# Altium PCB WorkLamp_control.PcbDoc
Units mm, origin at the board's own origin, x right, y up, seen from the top; angles counter-clockwise.
Board outline 40.89 x 73.15 mm, 2 copper layers (Top Layer, Bottom Layer), stack 1.571 mm thick; 63 components, 70 nets, 213 pads, 63 vias.
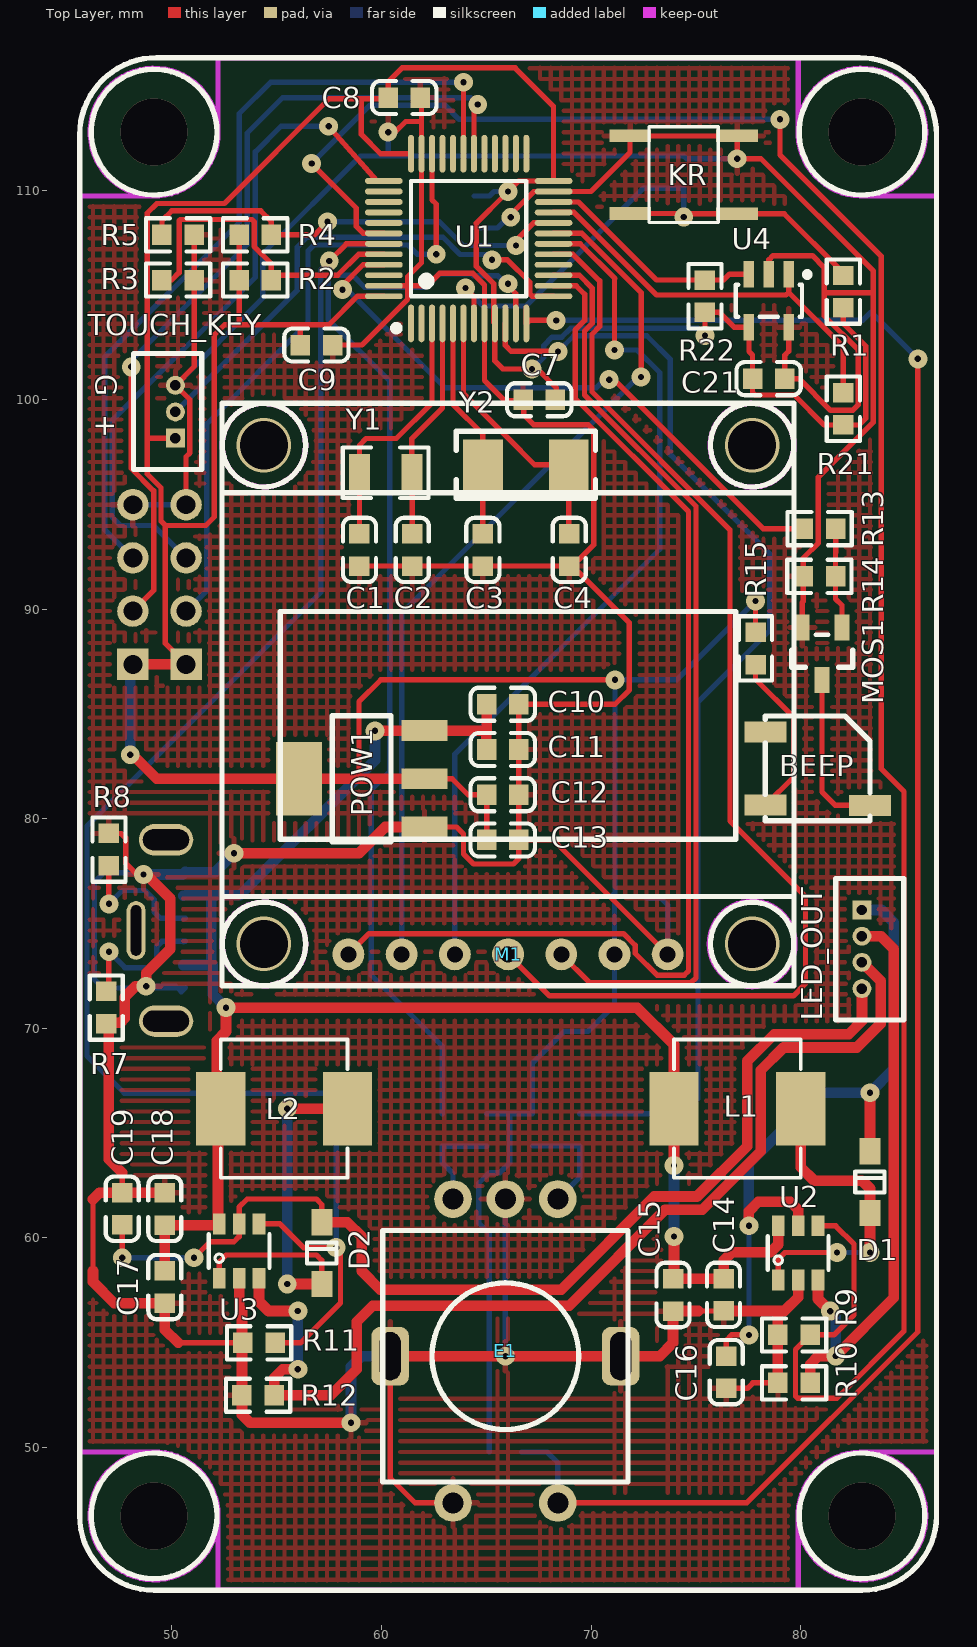
[diagram p0: Top Layer view]
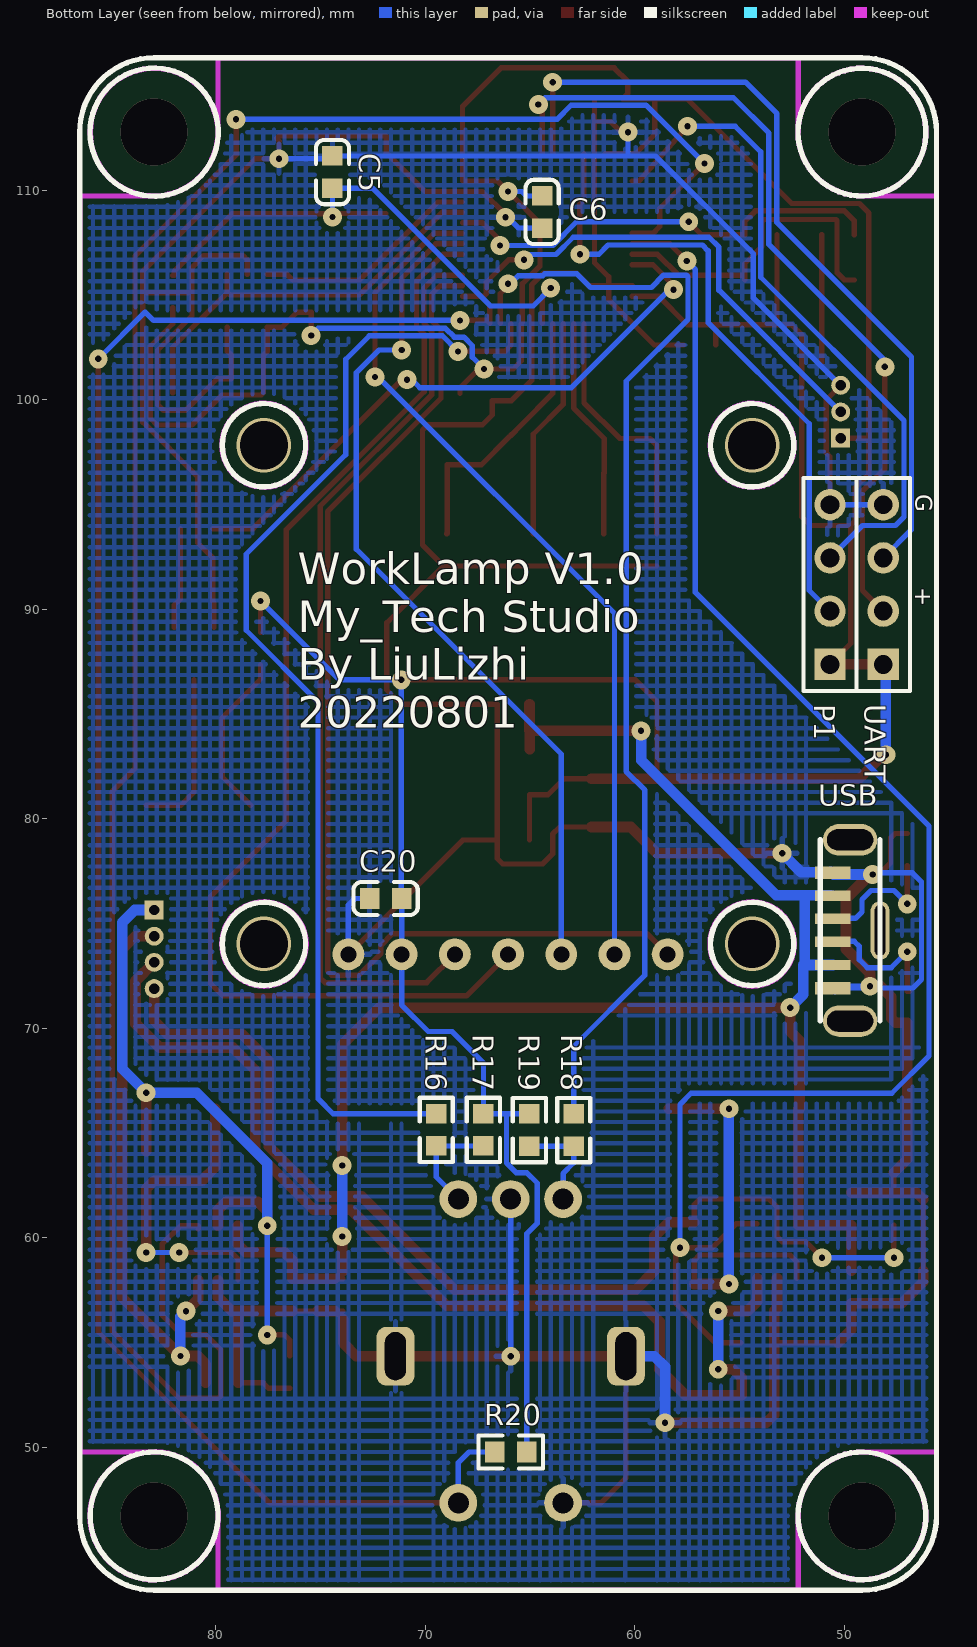
[diagram p1: Bottom Layer view, seen from below]
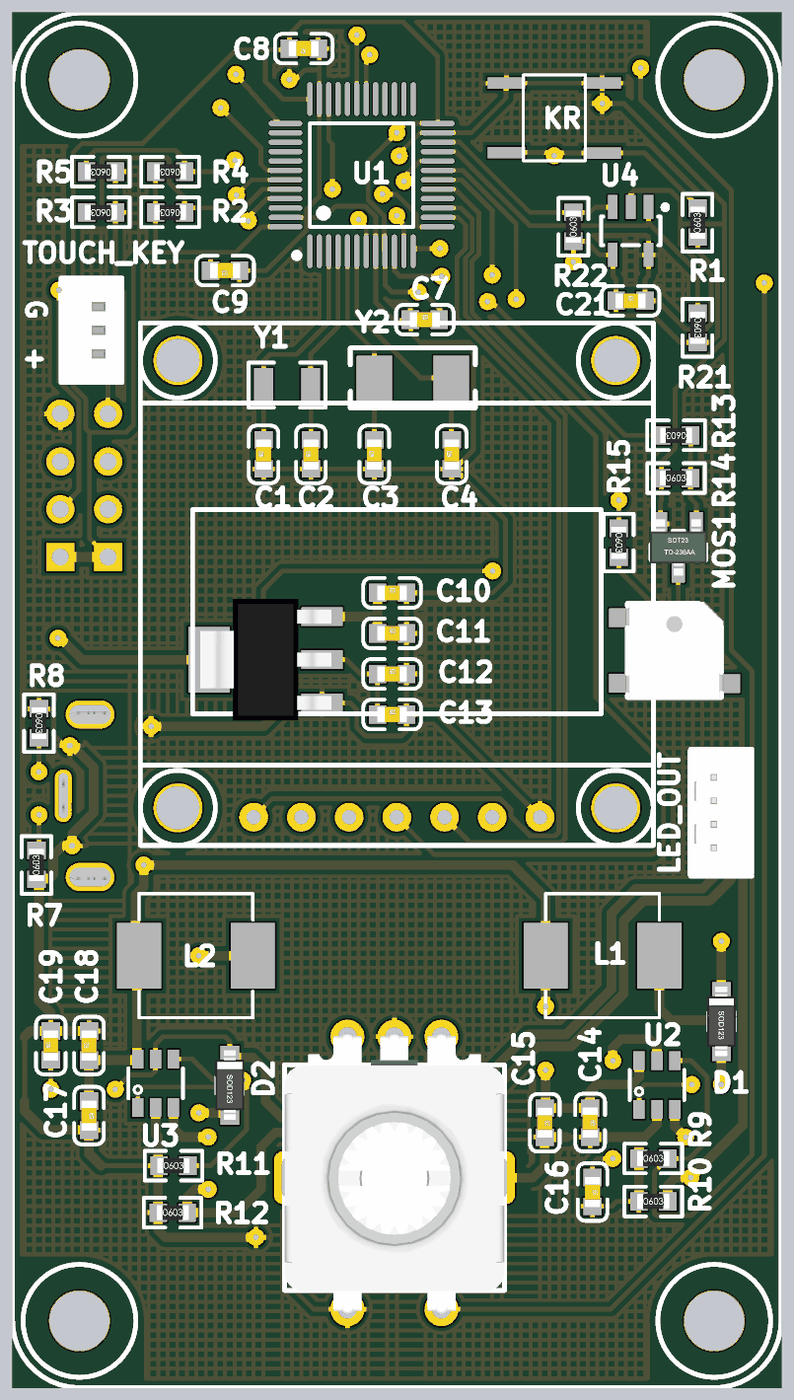
[diagram p2: 3D render of the assembled board from above, using the file's embedded part models]
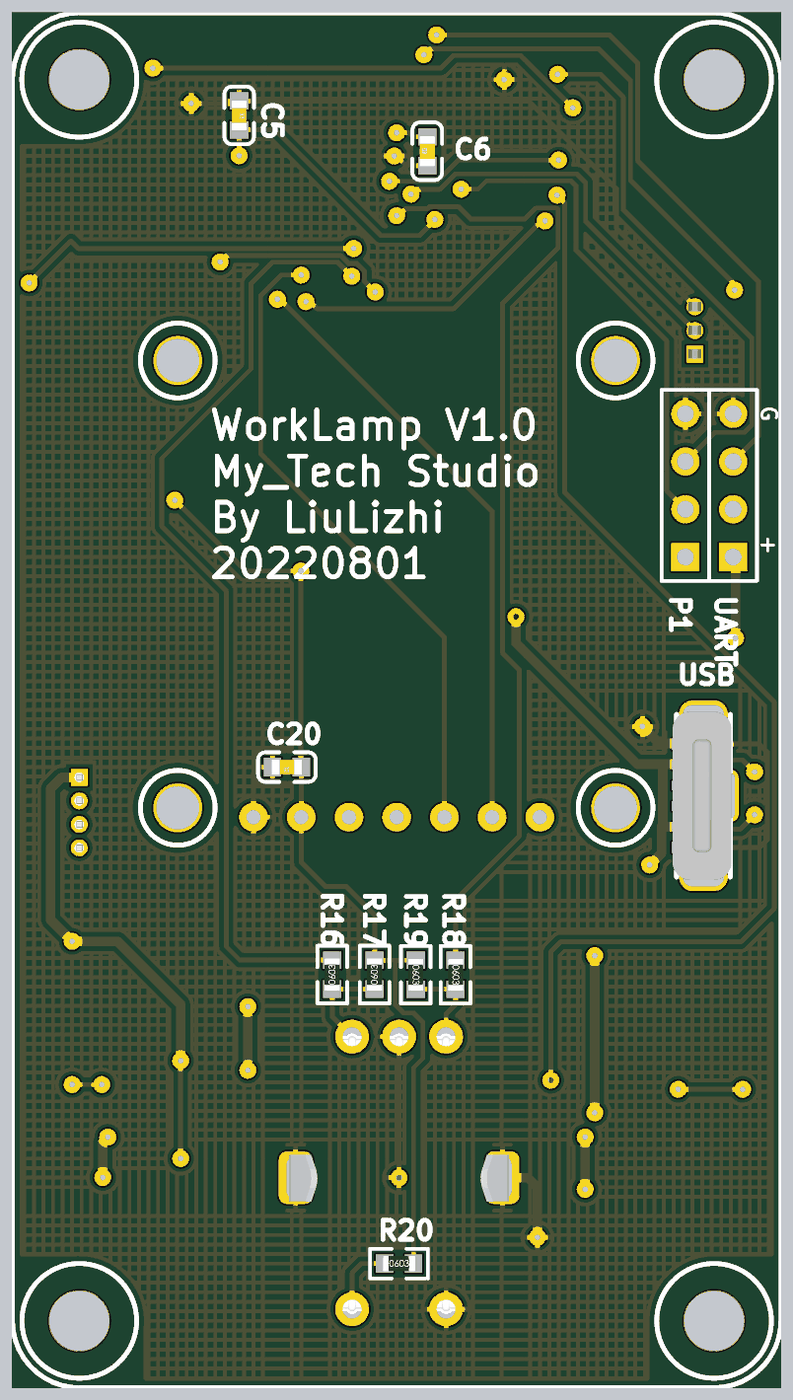
[diagram p3: 3D render of the assembled board from below, using the file's embedded part models]

## Layer stack, top to bottom
Top Solder: solder mask 0.0102, Solder Resist, Dk 3.5
Top Layer: signal copper 0.0356
Dielectric 1: dielectric 1.5, FR-4, Dk 4.8
Bottom Layer: signal copper 0.0356
Bottom Solder: solder mask 0.0102, Solder Resist, Dk 3.5

## Board outline
45.593,46.736 ccw(c49.149,46.736) 49.149,43.18 82.931,43.18 ccw(c82.931,46.736) 86.487,46.736 86.487,112.649 ccw(c82.804,112.649) 82.804,116.332 49.276,116.332 ccw(c49.276,112.649) 45.593,112.649

## Design rules (kind name [scope] priority, off if disabled: settings)
Clearance Clearance_4 [InNamedPolygon('GND_L01_P012')] p1: gap=0.254 ignorepadtopadclearanceinfootprint=FALSE except(0: Arc-Hole Track-Hole SMDPad-Hole THPad-Hole Via-Hole Fill-Hole Poly-Hole Region-Hole Text-Hole)
Clearance Clearance_3 [InNamedPolygon('GND_L01_P012')] p2: gap=0.254 ignorepadtopadclearanceinfootprint=FALSE
Clearance Clearance_2 [InNamedPolygon('NONET_L01_P010')] p3: gap=0.254 ignorepadtopadclearanceinfootprint=FALSE except(0: Arc-Hole Track-Hole SMDPad-Hole THPad-Hole Via-Hole Fill-Hole Poly-Hole Region-Hole Text-Hole)
Clearance Clearance_1 [InNamedPolygon('GND_L02_P008')] p4: gap=0.254 ignorepadtopadclearanceinfootprint=FALSE
Clearance [All] p5: gap=0.102 ignorepadtopadclearanceinfootprint=FALSE
ComponentClearance [All] p1 off: gap=0.254 collisioncheckmode=3 verticalgap=0.254 showdistances=FALSE
DiffPairsRouting [All] p1: maxlimit=0.254 minlimit=0.152 mostfreqgap=0.152 toplayer_minwidth=0.381 toplayer_maxwidth=0.381 toplayer_prefwidth=0.381 bottomlayer_minwidth=0.381 bottomlayer_maxwidth=0.381 bottomlayer_prefwidth=0.381 maxuncoupledlength=12.7
MinimumSolderMaskSliver [All] p1: minsoldermaskwidth=0.102
PolygonConnect [All] p1: connectstyle=Relief reliefconductorwidth=0.254 reliefentries=4 polygonreliefangle="90 Angle" airgapwidth=0.254
RoutingVias [All] p1: holewidth=0.3 width=0.9 viastyle="Through Hole" minholewidth=0.3 minwidth=0.9 maxholewidth=0.711 maxwidth=1.27
SilkToSilkClearance [All] p1 off: silktosilkclearance=0.254
SilkToSolderMaskClearance [IsPad] p1 off: minsilkscreentomaskgap=0.254 clearancetoexposedcopper=TRUE
SolderMaskExpansion [All] p1: expansion=0.102
Width [All] p1: maxlimit=0.508 minlimit=0.102 preferedwidth=0.254 minimp=50.000000 maximp=50.000000 favimp=50.000000
25 further rules are at their usual default settings.

## Classes and differential pairs
polygon class PolygonClass_2: GND_L02_P008

## Components (designator, comment, footprint, x,y, rotation, side; value= is the part's Value field where it differs from the comment)
BEEP "BEEP_5020_SMT" BEEP_5020_SMT 78.312,79.907 r0 top
C1 "10PF" 0603_C 58.948,92.837 r90 top
C2 "10PF" 0603_C 61.468,92.837 r90 top
C3 "10PF" 0603_C 64.839,92.837 r90 top
C4 "10PF" 0603_C 68.961,92.837 r90 top
C5 "104" 0603_C 74.422,110.871 r270 bottom
C6 "104" 0603_C 64.412,108.966 r90 bottom
C7 "104" 0603_C 67.527,100.005 r0 top
C8 "104" 0603_C 61.087,114.427 r180 top
C9 "104" 0603_C 56.896,102.616 r180 top
C10 "4.7uF" 0603_C 65.786,85.471 r0 top
C11 "104" 0603_C 65.786,83.312 r0 top
C12 "4.7uF" 0603_C 65.786,81.153 r0 top
C13 "104" 0603_C 65.786,78.994 r0 top
C14 "104" 0603_C 76.327,57.285 r270 top
C15 "22uF" 0603_C 73.914,57.277 r270 top
C16 "104" 0603_C 76.454,53.594 r270 top
C17 "104" 0603_C 49.657,57.658 r270 top
C18 "22uF" 0603_C 49.657,61.383 r90 top
C19 "104" 0603_C 47.625,61.391 r90 top
C20 "104" 0603_C 71.882,76.2 r0 bottom
C21 "104" 0603_C 78.478,101.009 r0 top
D1 "MBR0520" SOD_123 83.312,62.865 r90 top
D2 "MBR0520" SOD_123 57.15,59.478 r90 top
E1 "ENCODER" ENCODER_EC11_DIP 65.913,54.356 r180 top
KR "KEY_SMT" KEY_SMT 74.422,110.744 r0 top
L1 "10uH" 0630_L 80.01,66.167 r180 top
L2 "10uH" 0630_L 58.374,66.167 r180 top
LED_OUT "SH1.25mm_4P" SH1.25MM_4P 82.931,71.902 r90 top
M1 "OLED" OLED_0.96_SPI 66.04,73.533 r180 top
MOS1 "SI2302" SOT23 81.026,87.884 r270 top
P1 "SWD" HDR1X4 50.673,87.376 r90 bottom
POW1 "AMS1117_3.3" SOT223 59.055,81.915 r0 top
R1 "10K" 0603_R 82.042,105.164 r90 top
R2 "10K" 0603_R 53.975,105.716 r180 top
R3 "10K" 0603_R 50.292,105.716 r180 top
R4 "10K" 0603_R 53.975,107.875 r180 top
R5 "10K" 0603_R 50.292,107.875 r180 top
R7 "5.1K" 0603_R 46.863,70.993 r90 top
R8 "5.1K" 0603_R 46.99,78.535 r270 top
R9 "10K" 0603_R 79.69,55.372 r0 top
R10 "1.5R" 0603_R 79.69,53.086 r0 top
R11 "10K" 0603_R 54.155,54.991 r0 top
R12 "1.5R" 0603_R 54.11,52.493 r0 top
R13 "100R" 0603_R 80.907,93.853 r180 top
R14 "10K" 0603_R 80.899,91.575 r0 top
R15 "10R" 0603_R 77.851,88.138 r270 top
R16 "10K" 0603_R 69.469,65.159 r90 bottom
R17 "10K" 0603_R 67.218,65.159 r90 bottom
R18 "10K" 0603_R 62.905,65.151 r270 bottom
R19 "10K" 0603_R 65.024,65.151 r270 bottom
R20 "10K" 0603_R 65.913,49.784 r180 bottom
R21 "10K" 0603_R 82.042,99.572 r270 top
R22 "10K" 0603_R 75.438,104.946 r90 top
TOUCH_KEY "SH1.25mm_3P" SH1.25mm_3P 50.165,100.691 r270 top
U1 "STM32F103C8T6" LQFP48 64.262,107.696 r90 top
U2 "SGM3732" TSOT_23_6 78.933,57.989 r90 top
U3 "SGM3732" TSOT_23_6 52.255,58.081 r90 top
U4 "CAT24C02_TSOT23" SOT_23_5 80.325,105.998 r270 top
UART "Header_2.54_4P" HDR1_4P 48.133,87.376 r90 bottom
USB "USB_C_6P_SMT_S1" USB_C_6PIN_SMT_S1 50.546,74.676 r90 bottom
Y1 "32.768K" XTAL_32.768_3215_2 60.198,96.52 r180 top
Y2 "8Mhz" XTAL_5032_2 66.889,96.901 r180 top

## Footprints (in the part's own frame and the unit in brackets; to place one, negate y for a bottom-side part, rotate by r counter-clockwise, add the part's x,y. Pads: shape width x height; smd on the part's side, far side on the other; paste and mask are expansions set on the pad)
0603_C [mm]
  rect 0.93x0.98 smd: 1(-0.77,0) 2(0.77,0)
  silkscreen extent -1.53,-0.79 1.54,0.79, body extent -0.8,-0.4 0.8,0.4, height 0.3
0603_R [mm]
  rect 0.93x0.98 smd: 1(-0.77,0) 2(0.77,0)
  silkscreen extent -1.53,-0.79 1.54,0.79, body extent -0.85,-0.4 0.85,0.4, height 0.56
0630_L [mm]
  rect 2.35x3.5 smd: 1(0,0) 2(6.05,0)
  silkscreen extent 0,-3.3 6.05,3.3
BEEP_5020_SMT [mm]
  rect 2x1 smd: 0(0.02,4.238) 1(0.012,0.75) 2(5,0.738)
  silkscreen extent 0,0 5,5, body extent -0.1,-0.11 5.1,5.09, height 2
ENCODER_EC11_DIP [mm]
  round 1.8 hole 1: 1(-2.5,-7.5) 2(0,-7.5) 3(2.5,-7.5) 4(-2.5,7) 5(2.5,7)
  rrect50% 1.8x2.8 hole 2.3 slot 1 at 0 deg: 6(-5.5,0) 6(5.5,0)
  silkscreen extent -5.85,-6 5.85,6, body extent -5.86,-7.69 5.86,7.26, height 19.5
HDR1_4P [mm]
  rect 1.5x1.5 hole 0.9: 1(0,0)
  round 1.5 hole 0.9: 2(2.54,0) 3(5.08,0) 4(7.62,0)
  silkscreen extent -1.27,-1.27 8.89,1.27
HDR1X4 [mm] "Connector; Header; 4 Position"
  rect 1.5x1.5 hole 0.9: 1(0,0)
  round 1.5 hole 0.9: 2(2.54,0) 3(5.08,0) 4(7.62,0)
  silkscreen extent -1.27,-1.27 8.89,1.27
KEY_SMT [mm]
  rect 2x0.6 smd: 1(-2.55,-1.85) 1(2.55,-1.87) 2(-2.55,1.85) 2(2.55,1.85)
  silkscreen extent -1.65,-2.29 1.65,2.29
LQFP48 [mm]
  oval 1.8x0.28 smd mask+0.051: 1(-4.05,2.85) 2(-4.05,2.35) 3(-4.05,1.85) 4(-4.05,1.35) 5(-4.05,0.85) 6(-4.05,0.35) 7(-4.05,-0.15) 8(-4.05,-0.65) 9(-4.05,-1.15) 10(-4.05,-1.65) 11(-4.05,-2.15) 12(-4.05,-2.65) 25(4.05,-2.65) 26(4.05,-2.15) 27(4.05,-1.65) 28(4.05,-1.15) 29(4.05,-0.65) 30(4.05,-0.15) 31(4.05,0.35) 32(4.05,0.85) 33(4.05,1.35) 34(4.05,1.85) 35(4.05,2.35) 36(4.05,2.85)
  oval 0.28x1.8 smd mask+0.051: 13(-2.75,-3.95) 14(-2.25,-3.95) 15(-1.75,-3.95) 16(-1.25,-3.95) 17(-0.75,-3.95) 18(-0.25,-3.95) 19(0.25,-3.95) 20(0.75,-3.95) 21(1.25,-3.95) 22(1.75,-3.95) 23(2.25,-3.95) 24(2.75,-3.95) 37(2.75,4.15) 38(2.25,4.15) 39(1.75,4.15) 40(1.25,4.15) 41(0.75,4.15) 42(0.25,4.15) 43(-0.25,4.15) 44(-0.75,4.15) 45(-1.25,4.15) 46(-1.75,4.15) 47(-2.25,4.15) 48(-2.75,4.15)
  silkscreen extent -4.42,-2.65 2.75,3.7
OLED_0.96_SPI [mil]
  round 60 hole 30: 1(-300,0) 2(-200,0) 3(-100,0) 4(0,0) 5(100,0) 6(200,0) 7(300,0)
  silkscreen extent -537,-1035 537,59
SH1.25mm_3P [mm]
  rect 0.9x0.9 hole 0.5: 1(2.52,0)
  round 0.9 hole 0.5: 2(1.27,0) 3(0,0)
  silkscreen extent -1.52,-2 4.02,1.25, body extent -1.5,-1.95 4,1.25, height 4.7
SH1.25MM_4P [mm]
  rect 0.9x0.9 hole 0.5: 1(3.75,0)
  round 0.9 hole 0.5: 2(2.5,0) 3(1.25,0) 4(0,0)
  silkscreen extent -1.5,-2 5.25,1.25, body extent -1.5,-1.91 5.25,1.41, height 4.22
SOD_123 [mm]
  rect 1.25x1 smd: 1(-1.675,0) 2(1.275,0)
  silkscreen extent -0.7,-0.7 0.3,0.7, body extent -2.05,-0.78 1.65,0.77, height 1.35
SOT23 [mm]
  rect 1.25x0.7 smd: 1(-1.25,0.95) 2(-1.25,-0.95) 3(1.25,0)
  silkscreen extent -0.9,-1.46 0.65,1.46, body extent -1.5,-1.5 1.5,1.5, height 1.3
SOT223 [mm]
  rect 2.2x1 smd: 1(3,-2.3) 2(3,0) 3(3,2.3)
  rect 2.2x3.5 smd: 2(-3,0)
  silkscreen extent -1.4,-3 1.4,3, body extent -3.49,-3.24 3.49,3.24, height 1.64
SOT_23_5 [mil]
  rect 50x20 smd: 1(0,-35) 2(0,-72.4) 3(0,-109.8) 4(100,-109.8) 5(100,-35)
  silkscreen extent 0,-134 80,0
TSOT_23_6 [mm]
  rect 0.99x0.6 smd: 1(0,0) 2(0,-0.95) 3(0,-1.9) 4(2.59,-1.9) 5(2.59,-0.95) 6(2.59,0)
  silkscreen extent 0.5,-2.4 2.1,0.5
USB_C_6PIN_SMT_S1 [mm]
  oval 1.5x2.6 hole 2.2 slot 1 at 0 deg: 0(-4.325,-0.83) 0(4.325,-0.83)
  oval 2.8x0.9 hole 0.5 slot 2.4 at 0 deg: 0(0,-2.26)
  rect 0.6x1.7 smd: 1(-2.75,0) 6(2.75,0)
  rect 0.5x1.7 smd: 2(-1.65,0) 3(-0.55,0) 4(0.55,0) 5(1.65,0)
  silkscreen extent -4.33,-2.26 4.33,0.6, body extent -4.48,-2.33 4.48,0.81, height 9.3
XTAL_32.768_3215_2 [mm]
  rect 1x1.8 smd: 1(-1.25,0) 2(1.25,0)
  silkscreen extent -2.05,-1.2 2.05,1.2
XTAL_5032_2 [mm]
  rect 1.9x2.4 smd: 1(-2.05,0) 2(2.05,0)
  silkscreen extent -3.32,-1.6 3.32,1.6

## Part data
C1 C2 C3 C4 C5 C6 C7 C8 C9 C10 C11 C12 C13 C14 C15 C16 C17 C18 C19 C20 C21: library part 0603_CAP
D1 D2: library part SOD123_MBR0520
E1: library part ENCODER_EC11_DIP
L1 L2: library part 0630_L
M1: library part OLED_0.96_SPI
MOS1: library part MOSN_SI2302_SOT23
P1: library part "Header 4", "Header, 4-Pin", LatestRevisionDate=17-Jul-2002, LatestRevisionNote="Re-released for DXP Platform.", Publisher="Altium Limited"
R1 R2 R3 R4 R5 R7 R8 R9 R10 R11 R12 R13 R14 R15 R16 R17 R18 R19 R20 R21 R22: library part 0603_RES
U2 U3: "PWM Dimming, 38V Step-Up LED Driver"
Y1: library part XTAL_32.768_3215_2
Y2: library part XTAL_8MHz_5032_2

## Via types
v1: diameter 0.9, hole 0.3, Top Layer to Bottom Layer, 55 vias
v2: diameter 3.2, hole 3.2, Top Layer to Bottom Layer, 4 vias
v3: diameter 2.6, hole 2.3, Top Layer to Bottom Layer, 4 vias

## Nets (pads, with @x,y where several pads share a name; then routed paths per layer and width w, separated by ;. In a path a pad name is that pad's centre, name@x,y a point inside that pad or via, vN(x,y) a via of type N, cw(c..) or ccw(c..) an arc to the next point about the centre after c; other vN are vias at no path point)
3V3: C6.2 C7.2 C8.2 C9.2 C12.1 C13.1 C20.1 C21.1 M1.2 P1.1 POW1.2 R1.1 R2.2 R4.2 R15.1 R17.2 R19.1 R20.2 R21.2 R22.1 TOUCH_KEY.1 U1.9 U1.24 U1.36 U1.48 U4.4 UART.1 | length 221.4
  Top Layer w0.254: TOUCH_KEY.1 48.819,98.171 ; P1.1 49.682,88.367 49.682,94.005 ; R4.2 R2.2 53.205,103.585 ; C9.2 56.126,103.585 ; 58.928,81.915 58.928,85.598 59.964,86.634 v1(71.14,86.634) ; 59.04,114.371 59.04,112.664 59.958,111.746 U1.36 ; U1.48 58.853,104.946 57.492,103.585 56.126,103.585 ; POW1.2@62.055,81.915 63.373,81.915 64.135,81.153 C12.1 C13.1 ; v1(66.04,109.946) 66.54,110.446 U1.24 68.212,114.008 66.377,115.842 60.978,115.842 60.325,115.189 60.325,114.625 60.579,114.371 57.5,114.371 52.502,109.372 49.276,109.372 48.819,108.915 48.819,98.171 ; v1@66.174,109.812 65.907,109.812 64.516,108.421 64.516,106.381 65.361,105.535 65.361,103.697 U1.9 65.412,101.854 65.793,101.473 67.437,101.473 68.334,100.576 C7.2@68.334,100.299 ; v1(75.438,103.073) R22.1 76.124,104.176 76.842,103.458 U4.4 77.536,102.305 77.708,102.133 C21.1 77.708,100.346 77.826,100.228 79.701,100.228 81.128,98.802 R21.2 82.796,98.802 83.116,99.122 83.116,102.558 82.042,103.632 R1.1 ; R15.1 v1(77.851,90.399) ; 48.819,98.171 48.819,96.464 49.479,95.804 49.479,94.209 49.682,94.005 ; 49.682,94.005 51.613,94.005 52.019,94.412 52.019,103.099 52.506,103.585 53.205,103.585 ; 53.205,103.585 56.126,103.585
  Top Layer w0.508: v1(48.006,83.058) 48.133,83.058 49.276,81.915 56.055,81.915 58.928,81.915 POW1.2@62.055,81.915 ; UART.1 P1.1
  Bottom Layer w0.254: C6.2@64.412,109.728 65.155,109.728 65.373,109.946 v1(66.04,109.946) ; R19.1 66.117,65.921 ; R20.2 65.143,60.206 64.643,60.706 64.643,62.611 65.151,63.119 65.659,63.119 66.117,63.577 66.117,65.921 ; v1(67.183,101.473) 67.749,102.039 67.749,102.592 68.147,102.99 68.603,102.99 69.028,103.414 75.097,103.414 v1(75.438,103.073) ; v1(71.14,86.634) 71.14,76.466 70.993,76.319 C20.1 71.12,76.192 M1.2 71.12,71.12 69.85,69.85 68.707,69.85 67.21,68.353 67.21,65.921 66.117,65.921 ; v1@71.145,86.634 74.086,86.634 v1(77.851,90.399)
  Bottom Layer w0.508: v1(48.006,83.058) 48.006,87.249 UART.1
+5: C10.1 C11.1 C14.1 C15.1 C17.1 C18.1 L1.2 L2.2 POW1.3 U2.6 U3.6 USB.2 USB.5 | length 119.6
  Top Layer w0.254: C18.1 50.927,60.613 50.985,60.671 ; L2.2@52.132,66.167 L2.2@52.197,66.102 ; L2.2 52.324,63.493 U3.6 ; C11.1@65.002,83.326 C11.1 ; 65.002,84.201 65.016,84.215 ; C15.1 C15.1@74.295,58.047 ; C15.1@74.303,58.055 C15.1@74.295,58.047 ; C14.1 75.116,58.055 75.108,58.047 C15.1@74.295,58.047 ; 50.985,60.671 U3.6 ; 50.985,60.671 U3.6 ; C15.1@74.295,58.047 73.96,58.382 C15.1@74.295,58.047
  Top Layer w0.508: C17.1 C18.1 ; C11.1@65.002,83.326 65.002,84.201 ; 65.016,84.215 C10.1 ; C15.1@73.96,58.382 v1(73.96,60.071) ; v1(73.96,63.454) L1.2 73.96,69.231 72.198,70.993 v1(52.578,70.993) 52.578,69.85 52.132,69.404 ; U2.6 78.933,59.69 78.552,59.309 76.708,59.309 76.327,58.928 C14.1 ; C18.1 U3.6@52.197,60.613 ; C18.1 U3.6@52.197,60.613 ; 52.132,69.404 52.132,66.167 52.132,69.404 ; U3.6@52.197,60.613 52.197,66.102 U3.6@52.197,60.613 ; 65.002,84.201 v1(59.69,84.201) 65.002,84.201 ; C14.1 74.303,58.055 C14.1
  Bottom Layer w0.254: USB.2 51.873,73.026 51.873,73.125 ; v1@73.96,60.025 v1(73.96,60.071)
  Bottom Layer w0.508: USB.5 USB.5@50.647,76.355 ; 51.873,73.125 51.873,76.355 ; v1(52.578,70.993) 51.943,71.628 51.943,73.025 51.942,73.026 ; v1(59.69,84.201) 59.69,82.804 53.241,76.355 ; v1(73.96,60.071) v1(73.96,63.454) ; USB.5@50.647,76.355 51.943,76.355 USB.5@50.647,76.355 ; 51.873,76.355 53.241,76.355 ; 51.873,76.355 53.241,76.355 ; 51.942,73.026 USB.2 51.942,73.026
BEEP: R13.2 U1.45 | length 29.6
  Top Layer w0.254: v1(58.141,105.258) 58.141,105.461 59.126,106.446 U1.45 ; v1(70.866,100.965) 71.095,100.965 78.207,93.853 R13.2
  Bottom Layer w0.254: v1(58.141,105.258) 58.344,105.258 63.017,100.584 70.256,100.584 70.637,100.965 v1(70.866,100.965)
BOOT0: R2.1 R3.2 U1.44 | length 19.2
  Top Layer w0.254: R3.2 49.987,105.716 50.343,106.072 50.343,108.56 50.394,108.61 53.823,108.61 53.924,108.509 53.924,107.315 54.745,106.494 R2.1@54.745,105.951 ; R2.1 R2.1@54.745,105.951 ; U1.44 58.907,106.946 57.912,105.951 ; R2.1@54.745,105.951 57.912,105.951 ; R2.1@54.745,105.951 57.912,105.951
BOOT1: R4.1 R5.2 U1.20 | length 21.7
  Top Layer w0.254: R5.2 49.522,108.552 49.987,109.017 54.237,109.017 54.745,108.509 R4.1 56.796,107.875 v1(57.419,108.499) ; v1(66.421,107.366) 66.421,107.59 66.412,107.599 67.259,108.446 U1.20
  Bottom Layer w0.254: v1(57.419,108.499) 62.77,108.499 63.902,107.366 v1(66.421,107.366)
EA: R16.2 U1.10 | length 54.4
  Top Layer w0.254: U1.10 65.912,102.592 66.192,102.311 v1(68.428,102.311)
  Bottom Layer w0.254: v1(68.428,102.311) 69.175,103.059 72.659,103.059 73.787,101.93 73.787,97.384 78.537,92.634 78.537,89.002 75.108,85.573 75.108,66.65 74.387,65.929 R16.2
EB: R18.1 U1.11 | length 54.3
  Top Layer w0.254: v1(66.04,105.537) 66.04,105.435 66.412,105.063 U1.11
  Bottom Layer w0.254: R18.1 62.905,69.15 59.512,72.542 59.512,81.382 60.401,82.271 60.401,100.889 57.455,103.835 57.455,105.885 57.52,105.951 58.612,105.951 59.2,105.363 62.102,105.363 62.755,106.015 64.289,106.015 64.386,105.918 65.557,105.918 65.938,105.537 v1(66.04,105.537)
EK: E1.4 R20.1 U1.12 | length 91.4
  Top Layer w0.254: U1.12@66.912,104.394 U1.12 67.057,103.791 v1(68.334,103.791) ; E1.4 77.43,47.356 85.598,55.524 v1(85.598,101.956)
  Bottom Layer w0.254: R20.1 67.905,49.784 68.413,49.276 E1.4 ; v1(68.334,103.791) 82.963,103.791 83.363,104.191 v1(85.598,101.956)
GND: C1.1 C2.1 C3.1 C4.1 C5.1 C6.1 C7.1 C8.1 C9.1 C10.2 C11.2 C12.2 C13.2 C14.2 C15.2 C16.2 C17.2 C18.2 C19.2 C20.2 C21.2 E1.2 E1.5 E1.6 KR.2 M1.1 MOS1.2 P1.4 POW1.1 R3.1 R5.1 R7.1 R8.1 R9.1 R10.1 R11.1 R12.1 R14.1 TOUCH_KEY.3 U1.8 U1.23 U1.35 U1.47 U2.2 U3.2 U4.2 U4.5 UART.4 USB.1 USB.6 | length 336.4
  Top Layer w0.254: 46.228,58.42 46.228,61.849 ; 46.863,66.548 R7.1 ; R8.1 47.575,79.305 47.787,79.093 47.787,77.889 48.333,77.343 v1(48.641,77.343) ; C19.2 47.625,63.119 ; C18.2@49.649,62.161 C18.2 ; 50.292,54.991 53.34,54.991 R11.1 ; P1.4 50.673,97.282 50.851,97.46 50.851,100.005 TOUCH_KEY.3 51.062,101.588 R3.1 R5.1 ; C9.1 59.063,102.616 61.241,104.793 61.241,105.446 ; C1.1 C2.1 C3.1 C4.1 C4.1@69.121,92.067 ; U1.47 61.241,105.446 ; v1(60.317,112.776) 60.647,112.776 61.155,113.284 61.912,113.284 ; E1.6@60.413,54.356 60.413,48.553 61.61,47.356 E1.5 ; 61.366,105.446 62.186,105.446 62.785,106.045 64.349,106.045 64.915,105.479 64.915,104.404 64.912,104.401 U1.8 64.912,100.928 65.891,99.949 66.794,99.949 66.794,99.284 67.272,98.806 69.871,98.806 70.124,98.552 70.124,93.07 C4.1@69.121,92.067 ; C8.1 61.912,114.427 61.912,113.284 ; POW1.1 63.571,79.615 63.912,79.274 63.912,78.328 64.389,77.851 66.294,77.851 66.556,78.113 C13.2 ; v1(66.167,108.712) 66.167,108.839 67.274,109.946 U1.23 70.002,109.946 71.857,111.8 71.857,112.594 71.872,112.594 76.972,112.594 77.089,112.477 76.962,112.35 76.972,112.34 v1(76.972,111.506) 78.105,111.506 83.472,106.139 83.472,105.105 ; M1.1 68.199,78.994 C13.2 ; C15.2@73.914,56.126 C15.2@74.295,56.507 ; C15.2 C15.2@74.295,56.507 ; C15.2@74.303,56.515 C15.2@74.295,56.507 ; C14.2 75.116,56.515 75.108,56.507 C15.2@74.295,56.507 ; C16.2 77.462,52.824 77.724,53.086 R10.1 ; U4.2 78.486,106.68 78.689,106.883 80.569,106.883 81.128,106.324 81.128,105.105 ; U4.5 79.436,102.321 79.248,102.133 C21.2 79.919,101.009 81.433,99.496 82.485,99.496 82.761,99.771 82.761,102.38 81.128,104.013 81.128,105.105 ; MOS1.2 80.076,90.322 80.129,90.375 R14.1 80.129,92.448 80.848,93.167 80.848,96.314 83.472,98.937 83.472,105.105 ; 61.241,105.446 61.241,105.872 61.912,106.544 U1.35 61.912,113.284 ; C13.2 C12.2 C11.2 C10.2 71.145,85.471 71.831,86.157 71.831,89.357 C4.1@69.121,92.067 ; 81.128,105.105 83.472,105.105
  Top Layer w0.508: 46.228,58.42 46.228,57.912 47.252,56.888 C17.2 49.657,55.626 50.292,54.991 ; 46.228,61.849 46.54,62.161 C19.2 C18.2@49.649,62.161 ; 47.625,63.119 46.99,63.754 46.99,70.272 47.546,70.272 47.752,70.478 47.752,71.501 48.26,72.009 v1(48.768,72.009) 48.768,72.644 49.911,73.787 49.911,76.2 48.768,77.343 v1(48.641,77.343) ; v1(52.959,78.359) 58.928,78.359 60.184,79.615 POW1.1 ; U3.2 53.205,56.65 53.34,56.515 53.34,54.991 R12.1 53.34,51.562 53.721,51.181 v1(58.547,51.181) ; E1.6@60.413,54.356 v1(65.913,54.356) 71.413,54.356 73.279,54.356 73.914,54.991 C15.2@73.914,56.126 ; C15.2@74.303,56.515 75.116,56.515 ; C14.2 78.92,56.515 ; R10.1 R9.1 78.92,56.515 ; U2.2 79.883,57.174 79.224,56.515 78.92,56.515
  Bottom Layer w0.254: UART.4 P1.4 ; v1@48.46,71.955 48.822,71.955 v1(48.768,72.009) 50.193,72.009 USB.1@50.276,71.926 ; TOUCH_KEY.3 54.334,104.86 54.334,106.971 59.004,111.641 60.325,111.641 ; USB.1 USB.1@50.276,71.926 ; USB.6 46.736,77.426 46.304,76.994 46.304,72.339 46.717,71.926 USB.1@50.276,71.926 ; USB.6@50.632,77.47 USB.6@50.647,77.455 ; USB.1@50.647,71.955 50.447,71.755 USB.1@50.276,71.926 ; v1@60.647,112.776 v1(60.317,112.776) 60.317,111.649 60.325,111.641 ; 63.644,111.641 60.325,111.641 ; 63.67,111.641 C5.1 74.557,111.506 v1(76.972,111.506) ; C6.1@64.412,108.204 65.532,108.204 66.116,108.788 66.167,108.737 v1(66.167,108.712) ; v1(65.913,54.356) E1.2 ; C20.2 73.353,76.2 73.66,75.893 M1.1
  Bottom Layer w0.508: v1(48.641,77.343) 50.505,77.343 USB.6@50.632,77.47 ; USB.6@50.647,77.455 52.055,77.455 v1(52.959,78.359) ; v1(58.547,51.181) 58.547,53.848 59.055,54.356 E1.6@60.413,54.356
NetBEEP_1: BEEP.1 R15.2 | length 8
  Top Layer w0.254: R15.2 77.851,86.665 79.68,84.836 79.68,82.013 BEEP.1
NetBEEP_2: BEEP.2 MOS1.3 | length 7.9
  Top Layer w0.254: MOS1.3 81.026,81.28 81.661,80.645 BEEP.2
NetC16_1: C16.1 D1.2 LED_OUT.1 U2.5 | length 34.6
  Top Layer w0.254: C16.1 76.454,55.118 76.708,55.372 v1(77.536,55.372)
  Top Layer w0.508: v1(77.536,60.579) 77.536,61.28 77.978,61.722 79.502,61.722 79.883,61.341 U2.5 ; D1.2 v1(83.312,66.929)
  Bottom Layer w0.254: v1(77.536,55.372) v1(77.536,60.579)
  Bottom Layer w0.508: v1(77.536,60.579) 77.536,63.566 80.899,66.929 v1(83.312,66.929) 84.455,68.072 84.455,75.057 83.86,75.652 LED_OUT.1
NetC19_1: C19.1 D2.2 LED_OUT.4 U3.5 | length 51.3
  Top Layer w0.254: v1(47.625,59.055) C19.1 ; v1(51.054,59.055) 51.816,59.817 52.959,59.817 53.205,60.063 U3.5 53.205,61.467 53.594,61.856 56.889,61.856 57.15,61.595 D2.2@57.15,60.753
  Top Layer w0.508: D2.2@57.15,60.753 58.373,60.753 59.055,60.071 59.055,58.42 59.944,57.531 68.58,57.531 73.025,61.976 75.057,61.976 77.462,64.381 77.462,68.445 78.74,69.723 82.296,69.723 82.931,70.358 LED_OUT.4
  Bottom Layer w0.254: v1(47.625,59.055) v1(51.054,59.055)
NetD1_1: D1.1 L1.1 U2.1 | length 15.1
  Top Layer w0.254: U2.1 78.933,58.994 79.248,59.309 v1(81.737,59.309)
  Top Layer w0.508: L1.1 80.01,63.373 80.645,62.738 82.931,62.738 83.312,62.357 D1.1 v1(83.312,59.309)
  Bottom Layer w0.254: v1(81.737,59.309) v1(83.312,59.309)
NetD2_1: D2.1 L2.1 U3.1 | length 19.9
  Top Layer w0.254: U3.1 52.255,58.859 52.578,59.182 56.896,59.182 57.15,58.928 D2.1
  Top Layer w0.508: v1(55.499,57.803) D2.1 ; v1(55.499,66.167) L2.1
  Bottom Layer w0.508: v1(55.499,57.803) v1(55.499,66.167)
NetE1_1: E1.1 R16.1 R17.1 | length 5.2
  Bottom Layer w0.254: R17.1 R16.1 69.469,62.912 E1.1
NetE1_3: E1.3 R18.2 R19.2 | length 4.9
  Bottom Layer w0.254: E1.3 63.413,63.079 62.905,63.587 R18.2 R19.2
NetLED1_1_1: 
NetLED1_1_2: 
NetLED1_2_1: 
NetLED1_3_1: 
NetLED1_4_1: 
NetLED1_5_1: 
NetLED1_6_1: 
NetLED2_1_1: 
NetLED2_1_2: 
NetLED2_2_1: 
NetLED2_3_1: 
NetLED2_4_1: 
NetLED2_5_1: 
NetLED2_6_1: 
NetLED_OUT_2: LED_OUT.2 R10.2 U2.3 | length 28.6
  Top Layer w0.508: R10.2 80.46,53.975 80.849,54.364 v1(81.677,54.364) 84.455,57.142 84.455,73.787 83.84,74.402 LED_OUT.2 ; U2.3 80.833,57.211 80.833,57.089 v1(81.415,56.507)
  Bottom Layer w0.508: v1(81.415,56.507) 81.677,56.245 v1(81.677,54.364)
NetLED_OUT_3: LED_OUT.3 R12.2 U3.3 | length 51.2
  Top Layer w0.508: U3.3 54.155,56.97 54.61,56.515 v1(56.007,56.515) ; v1(56.007,53.735) 55.291,53.735 54.88,53.324 R12.2 57.573,52.493 58.815,53.735 58.815,56.007 59.577,56.769 68.961,56.769 73.533,61.341 75.311,61.341 78.105,64.135 78.105,68.006 79.187,69.088 82.677,69.088 83.82,70.231 83.82,72.263 LED_OUT.3
  Bottom Layer w0.508: v1(56.007,53.735) v1(56.007,56.515)
NetMOS1_1: MOS1.1 R13.1 R14.2 | length 4.8
  Top Layer w0.254: R13.1 81.677,92.718 81.669,92.71 R14.2 81.669,90.502 81.976,90.195 MOS1.1
NetR7_2: R7.2 USB.3 | length 8.2
  Top Layer w0.254: R7.2 R7.2@46.99,71.763 ; v1(46.99,73.66) R7.2@46.99,71.812 ; R7.2@46.99,71.763 R7.2@46.99,71.812 ; R7.2@46.99,71.763 R7.2@46.99,71.812
  Bottom Layer w0.254: v1(46.99,73.66) 47.752,72.898 48.895,72.898 49.276,73.279 49.276,73.914 49.517,74.155 ; USB.3 USB.3@50.647,74.155 ; 49.517,74.155 USB.3@50.647,74.155 ; 49.517,74.155 USB.3@50.647,74.155
NetR8_2: R8.2 USB.4 | length 7.9
  Top Layer w0.254: v1(46.99,75.946) R8.2
  Bottom Layer w0.254: v1(46.99,75.946) 47.625,76.581 48.715,76.581 49.149,76.147 49.149,75.565 49.459,75.255 ; USB.4 USB.4@50.647,75.255 ; 49.459,75.255 USB.4@50.647,75.255 ; 49.459,75.255 USB.4@50.647,75.255
NRST: C5.2 KR.1 R1.2 U1.7 | length 30.8
  Top Layer w0.254: v1(64.008,105.336) 64.008,105.308 64.412,104.904 U1.7 ; KR.1@71.872,108.894 v1@74.397,108.894 ; v1(74.422,108.727) 74.422,108.869 v1@74.397,108.894 ; R1.2 R1.2@81.975,105.934 ; v1@74.397,108.894 v1@74.417,108.874 ; v1@74.397,108.894 v1@74.417,108.874 ; v1@74.417,108.874 KR.1@76.972,108.874 ; v1@74.417,108.874 KR.1@76.972,108.874 ; KR.1@76.972,108.874 79.223,108.874 R1.2@81.975,106.121 ; R1.2@81.975,105.934 R1.2@81.975,106.121 ; R1.2@81.975,105.934 R1.2@81.975,106.121
  Bottom Layer w0.254: v1(64.008,105.336) 64.008,105.308 64.839,104.477 66.887,104.477 72.511,110.101 C5.2 v1(74.422,108.727)
OLED_D/C: M1.6 U1.19 | length 41.8
  Top Layer w0.254: U1.19 69.57,107.946 72.39,105.126 v1(72.39,101.092)
  Bottom Layer w0.254: M1.6 60.96,89.814 72.238,101.092 v1(72.39,101.092)
OLED_RES: M1.5 U1.18 | length 41.5
  Top Layer w0.254: U1.18 69.484,107.446 71.138,105.792 71.12,105.773 v1(71.12,102.38)
  Bottom Layer w0.254: M1.5 63.5,83.091 73.279,92.87 73.279,101.295 72.194,102.38 v1(71.12,102.38)
OSCIN: C3.2 U1.5 Y2.2 | length 10.6
  Top Layer w0.254: U1.5 63.412,99.783 64.839,98.356 Y2.2 C3.2
OSCOUT: C4.2 U1.6 Y2.1 | length 13.1
  Top Layer w0.254: U1.6 63.912,100.299 65.409,98.802 65.881,98.33 65.884,98.33 66.018,98.196 66.018,98.193 67.31,96.901 Y2.1 68.939,93.629 C4.2
PA6: U1.16
PA8: U1.29
PA15: U1.38
PB3: U1.39
PB4: U1.40
PB5: U1.41
PB9: U1.46
PB12: U1.25
PB13: U1.26
PB14: U1.27
PB15: U1.28
PC13: U1.2
PC14: C1.2 U1.3 Y1.2 | length 12.3
  Top Layer w0.254: C1.2 Y1.2 58.948,97.833 59.266,98.151 60.706,98.151 62.412,99.857 U1.3
PC15: C2.2 U1.4 Y1.1 | length 10.7
  Top Layer w0.254: C2.2 61.468,96.5 Y1.1 61.448,98.151 62.912,99.615 U1.4
PWM1: R9.2 U1.42 U2.4 | length 107.3
  Top Layer w0.254: v1(56.667,111.277) 58.801,109.144 58.801,108.276 59.131,107.946 U1.42 ; v1(79.019,113.386) 79.019,111.684 83.845,106.858 83.845,82.398 84.938,81.305 84.938,55.55 81.737,52.349 79.858,52.349 79.756,52.451 79.756,54.668 R9.2 81.595,55.372 82.55,56.327 82.55,59.706 81.677,60.579 U2.4 U2.4@80.833,60.427
  Bottom Layer w0.254: v1(56.667,111.277) 59.452,114.062 63.023,114.062 63.7,113.386 v1(79.019,113.386)
PWM2: R11.2 U1.43 U3.4 | length 76.1
  Top Layer w0.254: U3.4 55.153,60.671 56.286,59.538 v1(57.836,59.538) 58.039,59.334 58.039,56.896 56.134,54.991 R11.2 ; v1(57.506,106.629) 58.322,107.446 U1.43
  Bottom Layer w0.254: v1(57.506,106.629) 57.099,106.223 57.099,90.805 45.949,79.654 45.949,68.682 47.727,66.904 57.302,66.904 57.836,66.37 v1(57.836,59.538)
SCL: R21.1 U1.21 U4.1 | length 19.6
  Top Layer w0.254: U1.21 69.19,108.946 73.132,105.004 79.309,105.004 79.436,105.131 ; U4.1 79.436,105.131 ; R21.1 82.042,102.525 79.436,105.131
SDA: R22.2 U1.22 U4.3 | length 11
  Top Layer w0.254: U1.22 69.393,109.446 73.123,105.716 R22.2 76.327,105.716 76.609,105.998 U4.3
SPI_CLK: M1.3 U1.15 | length 44.4
  Top Layer w0.254: U1.15 69.444,105.946 70.053,105.336 70.053,103.644 69.689,103.279 69.689,100.237 75.006,94.92 75.006,72.415 74.778,72.187 69.926,72.187 M1.3
SPI_CS: M1.7 U1.14 | length 54.1
  Top Layer w0.254: M1.7 59.411,74.524 71.552,74.524 72.111,73.965 72.111,73.584 73.152,72.542 74.447,72.542 74.651,72.746 74.651,94.665 69.24,100.075 69.24,103.334 69.698,103.791 69.698,105.04 69.291,105.446 U1.14
SPI_MOSI: M1.4 U1.17 | length 55.9
  Top Layer w0.254: M1.4 68.021,71.552 79.654,71.552 80.239,72.136 80.239,76.302 76.632,79.908 76.632,93.797 70.044,100.385 70.044,103.132 70.409,103.497 70.409,105.676 69.139,106.946 U1.17
SWCLK: P1.3 U1.37 | length 32.4
  Top Layer w0.254: v1(57.477,113.059) 59.792,110.446 U1.37
  Bottom Layer w0.254: P1.3 49.124,94.005 47.549,94.005 47.142,94.412 47.142,99.017 53.978,105.853 53.978,111.836 55.201,113.059 v1(57.477,113.059)
SWDIO: P1.2 U1.34 | length 30.9
  Top Layer w0.254: U1.34 62.412,109.546 62.611,109.347 v1(62.611,106.946)
  Bottom Layer w0.254: P1.2 51.664,90.907 51.664,98.857 56.49,103.683 56.49,107.112 56.769,107.391 61.265,107.391 61.71,106.946 v1(62.611,106.946)
TK: TOUCH_KEY.2 U1.13 | length 24.3
  Top Layer w0.254: v1(65.278,106.68) 66.015,106.68 67.081,105.613 67.081,105.054 67.19,104.946 U1.13
  Bottom Layer w0.254: TOUCH_KEY.2 55.982,105.238 55.982,107.29 56.453,107.761 62.927,107.761 63.754,106.934 65.278,106.934 v1(65.278,106.68)
U1_RX: U1.31 UART.3 | length 39.2
  Top Layer w0.254: U1.31 v1(63.912,115.158)
  Bottom Layer w0.254: UART.3 46.787,93.802 46.787,102.044 53.213,108.47 53.213,113.66 54.717,115.164 54.722,115.158 v1(63.912,115.158)
U1_TX: U1.30 UART.2 | length 40.2
  Top Layer w0.254: v1(48.057,101.575) 48.057,96.723 49.124,95.656 49.124,90.907 UART.2 ; U1.30 64.412,113.917 v1(64.592,114.097)
  Bottom Layer w0.254: v1(48.057,101.575) 48.057,101.879 53.594,107.417 53.594,112.729 55.283,114.418 64.271,114.418 v1(64.592,114.097)
USB_D+: U1.33
USB_D-: U1.32
VBAT: U1.1
pads on no net: BEEP.0 USB.0
copper on no net:
  other v2: 49.149,46.736 82.931,46.736 49.149,112.776 82.931,112.776
  other v3: 54.39,74.033 77.69,74.033 54.39,97.833 77.69,97.833

## Polygon pours and split planes (outlines as drawn)
GND on Bottom Layer "GND_L02_P008" (hatched 90Degree grid 0.508 track 0.203, remove dead copper, pour order 8): 52.197,116.332 79.883,116.332 79.883,112.649 82.804,109.728 86.487,109.728 86.487,49.784 82.804,49.784 79.883,46.863 79.883,43.18 52.197,43.18 52.197,46.609 49.022,49.784 45.593,49.784 45.593,109.728 49.276,109.728 52.197,112.649
GND on Top Layer "GND_L01_P012" (hatched 90Degree grid 0.508 track 0.203, remove dead copper, pour order 12): 52.197,116.332 79.883,116.332 79.883,112.776 82.931,109.728 86.487,109.728 86.487,49.784 82.931,49.784 79.883,46.736 79.883,43.18 52.2,43.18 52.2,46.733 49.149,49.784 45.593,49.784 45.593,109.728 49.149,109.728 52.197,112.776

## Keep-outs
Top Layer:
  circle w0.254: c54.39,97.833 r1.99
  circle w0.254: c77.69,97.833 r1.998
  circle w0.254: c77.69,74.033 r2.042
  circle w0.254: c54.39,74.033 r1.998
  circle w0.254: c49.149,46.736 r3.051
  circle w0.254: c82.931,46.736 r3.051
  circle w0.254: c82.931,112.776 r3.048
  circle w0.254: c49.149,112.776 r3.048
  lines w0.254: 49.149,49.784 45.593,49.784 45.593,109.728 49.149,109.728 ; 52.197,112.776 52.197,116.332 79.883,116.332 79.883,112.776 ; 52.2,43.18 79.883,43.18 79.883,46.736 ; 52.2,43.183 52.2,46.736 ; 82.931,49.784 86.487,49.784 86.487,109.728 82.931,109.728
Bottom Layer:
  circle w0.254: c54.39,97.833 r2.005
  circle w0.254: c77.69,97.833 r2.005
  circle w0.254: c77.69,74.033 r2.013
  circle w0.254: c54.39,74.033 r2.013
  circle w0.254: c49.149,46.736 r3.048
  circle w0.254: c82.931,46.736 r3.059
  circle w0.254: c82.931,112.776 r3.048
  circle w0.254: c49.149,112.776 r3.051
  lines w0.254: 49.276,49.784 45.593,49.784 45.593,109.728 49.276,109.728 ; 52.197,46.736 52.197,43.18 79.883,43.18 79.883,46.736 ; 52.197,112.779 52.197,116.332 79.883,116.332 79.883,112.649 ; 82.804,49.784 86.487,49.784 86.487,109.728 82.804,109.728

## Silkscreen, mask and mechanical layers (free items; w line width, h text height)
Top Overlay:
  circle w0.254: c77.69,74.033 r1.991
  circle w0.254: c54.39,74.033 r1.991
  circle w0.254: c77.69,97.833 r1.991
  circle w0.254: c54.39,97.833 r1.991
  circle w0.254: c82.931,46.736 r3
  circle w0.254: c49.149,46.736 r3
  circle w0.254: c82.931,112.776 r3
  circle w0.254: c49.149,112.776 r3
  lines w0.254: 45.593,46.736 ccw(c49.149,46.736) 49.149,43.18 82.931,43.18 ccw(c82.931,46.736) 86.487,46.736 86.487,112.649 ccw(c82.804,112.649) 82.804,116.332 49.276,116.332 ccw(c49.276,112.649) 45.593,112.649 45.593,46.736
  text "G  +" at 46.355,101.219 h1 r270
Bottom Overlay:
  circle w0.254: c77.69,74.033 r1.989
  circle w0.254: c54.39,74.033 r1.989
  circle w0.254: c77.69,97.833 r1.989
  circle w0.254: c54.39,97.833 r1.989
  circle w0.254: c82.931,46.736 r3.051
  circle w0.254: c49.149,46.736 r3.051
  circle w0.254: c49.149,112.776 r3.051
  circle w0.254: c82.931,112.776 r3.059
  lines w0.254: 45.593,46.736 ccw(c49.149,46.736) 49.149,43.18 82.931,43.18 ccw(c82.931,46.736) 86.487,46.736 86.487,112.776 ccw(c82.931,112.776) 82.931,116.332 49.149,116.332 ccw(c49.149,112.776) 45.593,112.776 45.593,46.736
  text "G          +" at 46.609,95.504 h0.8 r90
  text "WorkLamp V1.0 / My_Tech Studio  / By LiuLizhi / 20220801" at 76.073,84.345 h1.52
Mechanical 1:
  circle w0.254: c77.69,97.833 r1.304
  circle w0.254: c54.39,97.833 r1.237
  circle w0.254: c54.39,74.033 r1.236
  circle w0.254: c77.69,74.033 r1.304
  circle w0.254: c82.931,46.736 r1.651
  circle w0.254: c49.149,46.736 r1.651
  circle w0.254: c82.931,112.776 r1.651
  circle w0.254: c49.149,112.776 r1.656
  lines w0.254: 45.593,46.863 ccw(c49.276,46.863) 49.276,43.18 66.04,43.18 82.804,43.18 ccw(c82.804,46.863) 86.487,46.863 86.487,74.676 86.487,112.649 ccw(c82.804,112.649) 82.804,116.332 49.276,116.332 ccw(c49.276,112.649) 45.593,112.649 45.593,46.863